# EAGLE board ArduOSD_Simple manufacture (EAGLE 6.2)
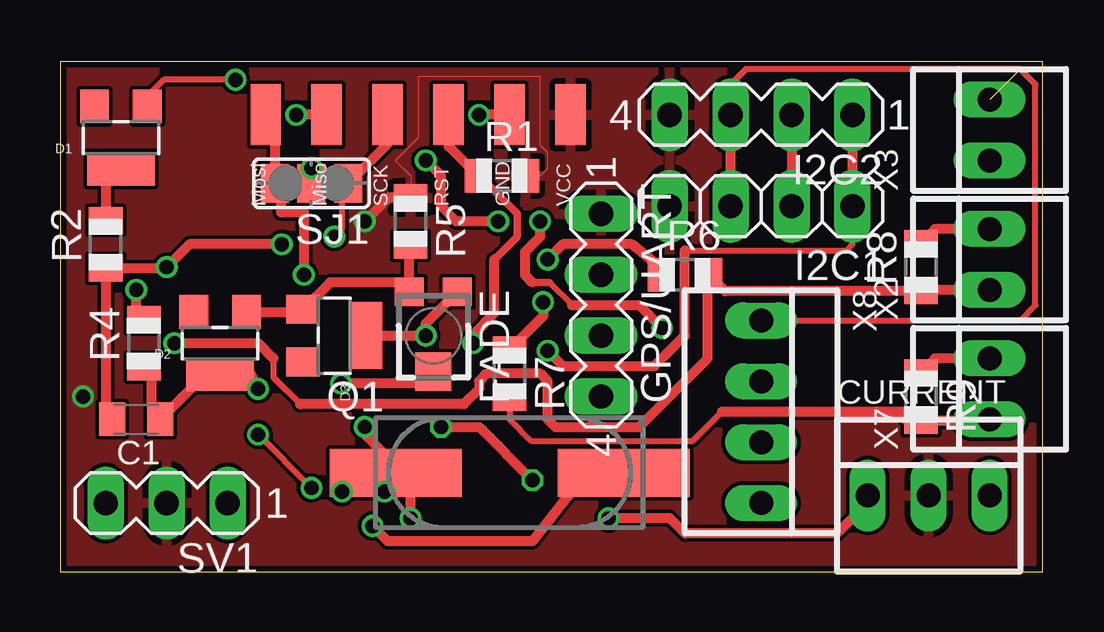
[diagram p0: board, top side]
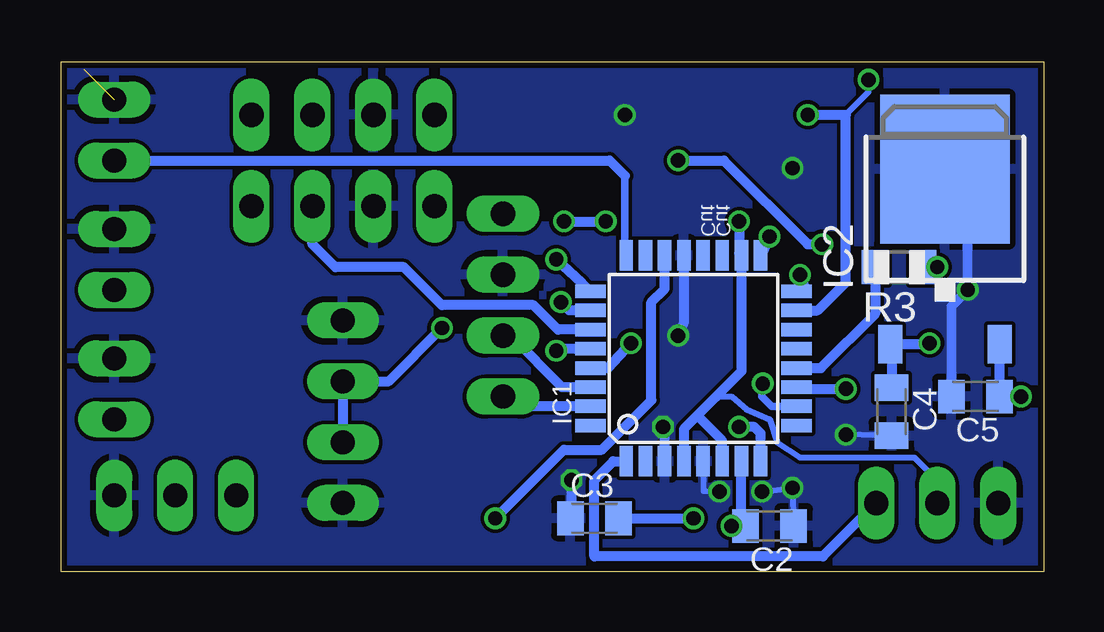
[diagram p1: board, bottom side, seen from below]

Size 40.95 x 21.26 mm. Coordinates in mm from the lower left corner, seen from the top.
Outline: 0,0 40.95,0 40.95,21.26 0,21.26 0,0
Copper layers (1*16): Top 0.035mm / dielectric 1.5mm / Bottom 0.035mm
Design rules: minimum track width 6mil, minimum drill 12mil, track to track 6mil, track to pad 6mil, pad to pad 6mil, via to via 6mil, smd to smd 0mil, copper to edge 10mil, drill to drill 10mil, minimum pad ring 10mil, minimum via ring 6mil, stop-mask expansion 2mil, vias tented up to drill 100mil, thermal gap 10mil

## Footprints (pad centres in the part's own frame; a part is rotated, then mirrored left to right if it is on the bottom)
C0805K = smd 1.1 x 1.4: 1 -1,0; 2 1,0
22-23-2031 = drill 1 long: 1 -2.54,0; 2 0,0; 3 2.54,0
SOT23-W = smd 1.2 x 1.4: 1 -1.1,-1.3; 2 1.1,-1.3 | smd 2.8 x 1.4: 3 0,1.3
TC33X = smd 1.2 x 1.2: 1 -1,-1.825; 3 1,-1.825 | smd 1.5 x 1.6: 2 0,1.5
MA04-1 = drill 1.016 long: 1 -3.81,0; 2 -1.27,0; 3 1.27,0; 4 3.81,0
1X04 = drill 1.016 long: 1 -3.81,0; 2 -1.27,0; 3 1.27,0; 4 3.81,0
TQFP32-08 = smd 1.27 x 0.559: 1 -4.293,2.8; 2 -4.293,2; 3 -4.293,1.2; 4 -4.293,0.4; 5 -4.293,-0.4; 6 -4.293,-1.2; 7 -4.293,-2; 8 -4.293,-2.8; 17 4.293,-2.8; 18 4.293,-2; 19 4.293,-1.2; 20 4.293,-0.4; 21 4.293,0.4; 22 4.293,1.2; 23 4.293,2; 24 4.293,2.8 | smd 0.559 x 1.27: 9 -2.8,-4.293; 10 -2,-4.293; 11 -1.2,-4.293; 12 -0.4,-4.293; 13 0.4,-4.293; 14 1.2,-4.293; 15 2,-4.293; 16 2.8,-4.293; 25 2.8,4.293; 26 2,4.293; 27 1.2,4.293; 28 0.4,4.293; 29 -0.4,4.293; 30 -1.2,4.293; 31 -2,4.293; 32 -2.8,4.293
TO252 = smd 1 x 1.6: 1 -2.28,-4.8; 2 2.28,-4.8 | smd 5.4 x 6.2: 3 0,2.5
CSM-7X-DU = smd 5.5 x 2: 1 -4.75,0; 2 4.75,0
R0805 = smd 1.1 x 1.4: 1 -1,0; 2 1,0
SJ_2 = smd 1.168 x 1.6: 1 -1.524,0; 2 0,0; 3 1.524,0
MA03-1 = drill 1.016 long: 1 -2.54,0; 2 0,0; 3 2.54,0
LINEAR_ISP = smd 1.27 x 2.54: P$1 -6.35,0; P$2 -3.81,0; P$3 -1.27,0; P$4 1.27,0; P$5 3.81,0; P$6 6.35,0
22-23-2021 = drill 1 long: 1 -1.27,0; 2 1.27,0
22-23-2041 = drill 1 long: 1 -3.81,0; 2 -1.27,0; 3 1.27,0; 4 3.81,0

## Placement (x,y rotation side)
C1  .1uf  [C0805K]  3.17,6.35 180 top
C2  .22uf  [C0805K]  11.43,1.91 180 bottom
C3  .22uf  [C0805K]  18.73,2.22 0 bottom
C4  .1uf  [C0805K]  6.35,6.67 270 bottom
C5  +1uf  [C0805K]  2.86,7.3 180 bottom
CURRENT  22-23-2031  [22-23-2031]  36.2,3.17 0 top
D1  [SOT23-W]  2.54,18.1 180 top
D2  [SOT23-W]  6.67,9.52 180 top
D3  [SOT23-W]  11.43,9.84 270 top
FADE  100k  [TC33X]  15.56,9.84 180 top
GPS/UART  [MA04-1]  22.54,11.11 270 top
I2C1  [1X04]  29.21,15.24 180 top
I2C2  [MA04-1]  29.21,19.05 180 top
IC1  ATMEGA168-AU  [TQFP32-08]  14.61,8.89 90 bottom
IC2  7805DT  [TO252]  4.13,14.29 0 bottom
Q1  16mhz  [CSM-7X-DU]  18.73,4.13 0 top
R1  [R0805]  18.41,16.51 0 top
R2  120  [R0805]  1.91,13.65 90 top
R3  100  [R0805]  6.03,12.7 180 bottom
R4  100k  [R0805]  3.49,9.52 90 top
R5  10k  [R0805]  14.61,14.6 270 top
R6  10k  [R0805]  26.04,12.38 0 top
R7  10k  [R0805]  18.73,8.26 270 top
R8  5k  [R0805]  35.88,12.7 90 top
R9  4k  [R0805]  35.88,7.3 270 top
SJ1  [SJ_2]  10.48,16.19 180 top
SV1  [MA03-1]  4.45,2.86 180 top
U$1  LIN_ISP  [LINEAR_ISP]  14.92,19.05 0 top
X2  Battery  [22-23-2021]  38.73,13.02 90 top
X3  Rssi  [22-23-2021]  38.73,18.41 90 top
X7  Batt_FLIGHT  [22-23-2021]  38.73,7.62 90 top
X8  Video  [22-23-2041]  29.21,6.67 270 top

## Library data of the parts
C1-C5 D1-D3 FADE IC2 R1-R9 = adafruit
CURRENT = con-molex; MF: MOLEX; MPN: 22-23-2031; OC_FARNELL: 1462950; OC_NEWARK: 30C0862
GPS/UART I2C2 SV1 = con-lstb; OC_FARNELL: unknown; OC_NEWARK: unknown
I2C1 = pinhead
IC1 = Arduino-AVR
Q1 = crystal; OC_FARNELL: unknown; OC_NEWARK: unknown
SJ1 = jumper
U$1 = Legot
X2 X3 X7 = con-molex; MF: MOLEX; MPN: 22-23-2021; OC_FARNELL: 1462926; OC_NEWARK: 25C3832
X8 = con-molex; MF: MOLEX; MPN: 22-23-2041; OC_FARNELL: 1462920; OC_NEWARK: 38C0355

## Nets
BATT_FPV: C4.1 IC2.1 R6.2 R8.1 X2.1
GND: C2.1 C3.1 C4.2 C5.2 CURRENT.3 D3.3 FADE.1 GPS/UART.2 I2C1.3 I2C2.3 IC1.3 IC1.5 IC1.21 IC2.3 R4.2 R8.2 R9.1 SJ1.2 SV1.3 U$1.P$5 X2.2 X3.2 X7.2 X8.1 X8.4
GPS_DAT: GPS/UART.3 IC1.30
N$1: IC1.29 R1.1 U$1.P$4
N$2: D1.1 IC1.15 U$1.P$2
N$3: D1.3 R2.2
N$4: IC1.12 R3.2
N$5: C1.2 R2.1 R3.1 X8.2 X8.3
N$6: C1.1 D2.3 IC1.11 R4.1
N$7: D2.1 D3.1 FADE.3 R5.2
N$8: FADE.2 IC1.10
N$9: GPS/UART.4 IC1.31
N$10: IC1.26 R7.1
N$11: C2.2 IC1.7 Q1.2
N$12: C3.2 IC1.8 Q1.1
N$13: IC1.25 R6.1
N$14: IC1.24 X3.1
N$15: IC1.16 SJ1.3 U$1.P$1
N$16: IC1.17 SJ1.1 U$1.P$3
N$17: CURRENT.1 IC1.22
N$18: IC1.1 SV1.1
N$19: R7.2 R9.2 X7.1
SCL: I2C1.1 I2C2.1 IC1.28
SDA: I2C1.2 I2C2.2 IC1.27
VCC: C5.1 CURRENT.2 GPS/UART.1 I2C1.4 I2C2.4 IC1.4 IC1.6 IC1.18 IC2.2 R1.2 R5.1 SV1.2 U$1.P$6

## Tracks (layer width: path | path; a pad name or v marks a point on that pad's centre or on a via)
BATT_FPV  (via drill 0.6)
  Top 0.254: 8.89,8.89 8.89,8.1 10,6.99
  Top 0.406: X2.1 35.92,11.75 R8.1 27.72,11.7 R6.2 26.99,12.34 26.99,8.89 24.13,6.03 20.64,6.03 20.32,6.35 20.32,7.94 20,8.26 17.78,8.26 17.46,7.94 17.46,7.62 16.83,6.99 10,6.99 | v4.76,9.52 8.26,9.52 8.89,8.89
  Bottom 0.406: C4.1 6.35,9.43 IC2.1 5.12,9.49 v4.76,9.52
GND  (via drill 0.6)  (1 unrouted)
  Top 0.254: X8.1 40.01,10.48 40.64,11.11 40.64,20.32 40.01,20.96 28.57,20.96 27.94,20.32 I2C2.3 | v8.26,5.71 v10.48,3.49 | v13.53,3.33 v11.75,3.33
  Top 0.406: R4.2 3.17,10.84 v3.17,11.75 | X7.2 36.47,8.89 R9.1 | X2.2 36.47,14.29 R8.2 | FADE.1 15.24,10.35 v15.24,9.84 D3.3 | SJ1.2 v10.48,16.83 | I2C1.3 I2C2.3 | v15.88,6.03 17.46,6.03 v19.68,3.81 | U$1.P$5 v17.46,19.05
  Bottom 0.254: C4.2 v8.26,5.71 | C2.1 v10.48,3.49 v11.75,3.33 | IC1.5 14.19,3.37 v13.53,3.33
  Bottom 0.406: C5.2 3.86,11.07 v3.17,11.75 3.17,15.84 IC2.3 | IC1.21 15.01,10.4 v15.24,9.84 | IC1.3 15.8,5.96 v15.88,6.03 | v19.68,3.81 19.68,2.27 C3.1
  pour Bottom: 0.32,21.91 41.91,21.91 41.59,-0.32 0,-0.32 0,21.27
GPS_DAT
  Bottom 0.406: GPS/UART.3 22.23,9.84 20.07,7.69 IC1.30
N$1  (via drill 0.6)
  Top 0.305: 18.1,13.02 19.05,13.97 19.05,14.92 17.46,16.51
  Top 0.406: v17.21,9.52 17.21,9.87 18.1,10.79 18.1,13.02 | U$1.P$4 16.19,17.73 R1.1 17.46,16.46 17.46,16.51
  Bottom 0.406: IC1.29 18.18,8.49 v17.21,9.52
N$2  (via drill 0.6)
  Top 0.254: v7.31,20.51 4.32,20.51 3.81,20 3.81,19.57 D1.1
  Top 0.406: U$1.P$2 v9.84,19.05
  Bottom 0.254: v7.31,20.51 7.31,19.99 8.26,19.05
  Bottom 0.406: v9.84,19.05 8.26,19.05 8.26,12.07 9.43,10.89 IC1.15
N$3
  Top 0.406: D1.3 1.91,16.16 R2.2
N$4
  Bottom 0.406: R3.2 7.03,10.75 9.29,8.49 IC1.12
N$5  (via drill 0.6)
  Top 0.254: 20.38,12.07 21.34,11.11
  Top 0.305: 19.68,12.07 20.38,12.07
  Top 0.406: C1.2 2.17,6.71 1.91,6.99 R2.1 4.4,12.65 v4.45,12.7 5.4,13.65 v9.24,13.65 | v25.08,10.16 24.13,11.11 21.34,11.11 | v20,14.6 20,13.97 19.37,13.34 19.37,12.38 19.68,12.07 | v18.26,14.6 16.51,14.6 15.88,15.24 15.88,16.51 v15.24,17.15
  Bottom 0.406: X8.3 X8.2 27.3,7.94 v25.08,10.16 | v4.45,12.7 R3.1 | v20,14.6 v18.26,14.6 | v15.24,17.15 13.34,17.15 9.84,13.65 v9.24,13.65
N$6  (via drill 0.6)
  Top 0.406: v8.26,7.62 7.97,8.23 D2.3 6.05,8.23 C1.1 4.13,6.67 3.81,6.99 3.81,8.21 R4.1
  Bottom 0.406: IC1.11 10.24,7.62 v8.26,7.62
N$7
  Top 0.406: D2.1 10.01,10.82 D3.1 11.25,12.07 14.61,12.07 14.56,12.02 FADE.3 14.56,13.56 R5.2
N$8  (via drill 0.6)
  Top 0.406: FADE.2 14.9,7.84 v11.72,7.84
  Bottom 0.305: IC1.10 11.34,6.89 11.75,7.3 11.75,7.81 v11.72,7.84
N$9
  Bottom 0.406: IC1.31 22.13,6.89 GPS/UART.4
N$10  (via drill 0.6)
  Top 0.406: v20.13,11.24 20.13,10.65 R7.1
  Bottom 0.406: IC1.26 19.78,10.89 v20.13,11.24
N$11  (via drill 0.6)
  Top 0.406: Q1.2 21.91,4.13 19.68,1.27 13.65,1.27 v13.02,1.91
  Bottom 0.406: IC1.7 12.61,2.4 C2.2 v13.02,1.91
N$12  (via drill 0.6)
  Top 0.406: v14.61,2.22 14.61,3.51 Q1.1 13.65,4.46 13.65,4.76 12.7,5.71 v12.7,6.03
  Bottom 0.406: C3.2 v14.61,2.22 | IC1.8 11.8,5.77 12.06,6.03 v12.7,6.03
N$13  (via drill 0.6)
  Top 0.406: R6.1 25.04,12.65 23.81,13.65 20.95,13.65 v20.32,13.02
  Bottom 0.406: v20.32,13.02 19.27,12.07 IC1.25
N$14
  Bottom 0.305: 17.46,16.51 17.46,13.24
  Bottom 0.406: X3.1 18.1,17.15 17.46,16.51 | 17.46,13.24 IC1.24
N$15  (via drill 0.6)
  Top 0.406: U$1.P$1 8.95,18.67 SJ1.3 9.21,15.94 9.21,14.99 10.16,14.99 v10.16,12.38
  Bottom 0.406: v10.16,12.38 9.9,11.69 IC1.16
N$16  (via drill 0.6)
  Top 0.254: 12,16.13 12,15.81 11.75,15.56 11.75,14.29 v11.43,13.97
  Top 0.406: U$1.P$3 13.65,17.84 SJ1.1 12,16.13
  Bottom 0.406: v11.43,13.97 11.75,13.24 IC1.17
N$17  (via drill 0.6)
  Top 0.406: CURRENT.1 33.66,2.86 32.38,1.59 26.04,1.59 25.4,2.22 v22.86,2.22
  Bottom 0.406: v22.86,2.22 20,5.08 18.41,5.08 16.35,7.14 16.35,11.24 15.8,11.79 IC1.22
N$18
  Bottom 0.406: SV1.1 9.21,0.63 18.73,0.63 18.73,3.81 17.95,4.6 IC1.1
N$19
  Top 0.254: R7.2 18.73,6.35 19.62,5.46 26.37,5.46 27.57,6.67
  Top 0.406: X7.1 38.69,6.3 R9.2 35.29,6.3 35.24,6.35 35.24,6.67 27.57,6.67
SCL  (via drill 0.6)
  Top 0.254: 26.04,13.4 32.77,13.4 33.02,13.65 I2C1.1
  Top 0.406: I2C2.1 I2C1.1 | v20.32,9.21 20.95,8.57 24.77,8.57 26.04,9.84 26.04,13.4
  Bottom 0.406: IC1.28 20.24,9.29 v20.32,9.21
SDA
  Top 0.406: I2C2.2 I2C1.2
  Bottom 0.406: IC1.27 20.25,10.09 21.27,11.11 25.08,11.11 26.67,12.7 29.53,12.7 30.48,13.65 I2C1.2
VCC  (via drill 0.6)
  Top 0: R1.2 20,16.51 20.32,16.83 20.32,17.46 20,17.78 20,20.64 14.92,20.64 14.92,18.1 13.97,17.15 14.61,16.51 R5.1
  Top 0.406: R5.1 13.7,15.6 v12.7,14.6
  Bottom 0: 13.4,5.33 13.34,5.4 14.29,6.35 14.29,6.67 13.65,7.3
  Bottom 0.254: 13.65,7.3 13.02,7.3 12.38,6.76 11.43,6.35 11.11,5.4 10.16,4.76 5.4,4.76 4.45,3.81 SV1.2
  Bottom 0.406: IC2.2 C5.1 v0.95,7.3 | v12.7,14.6 12.7,13.28 IC1.18 12.61,8.35 13.65,7.3 14.45,6.51 | 14.45,6.51 15.01,5.95 IC1.4 | IC1.6 13.4,5.33 13.4,5.47 14.29,6.35 14.45,6.51
  pour Top: -2.54,21.91 41.91,21.91 41.59,-0.32 -2.54,-0.32

## Text on the board
bPlace: Cut | Cut